# Altium PCB PCB layout.PcbDoc
Units mil, origin at the board's own origin, x right, y up, seen from the top; angles counter-clockwise.
Board outline 1820 x 1890 mil, 2 copper layers (Top Layer, Bottom Layer); 22 components, 21 nets, 82 pads, 2 vias.
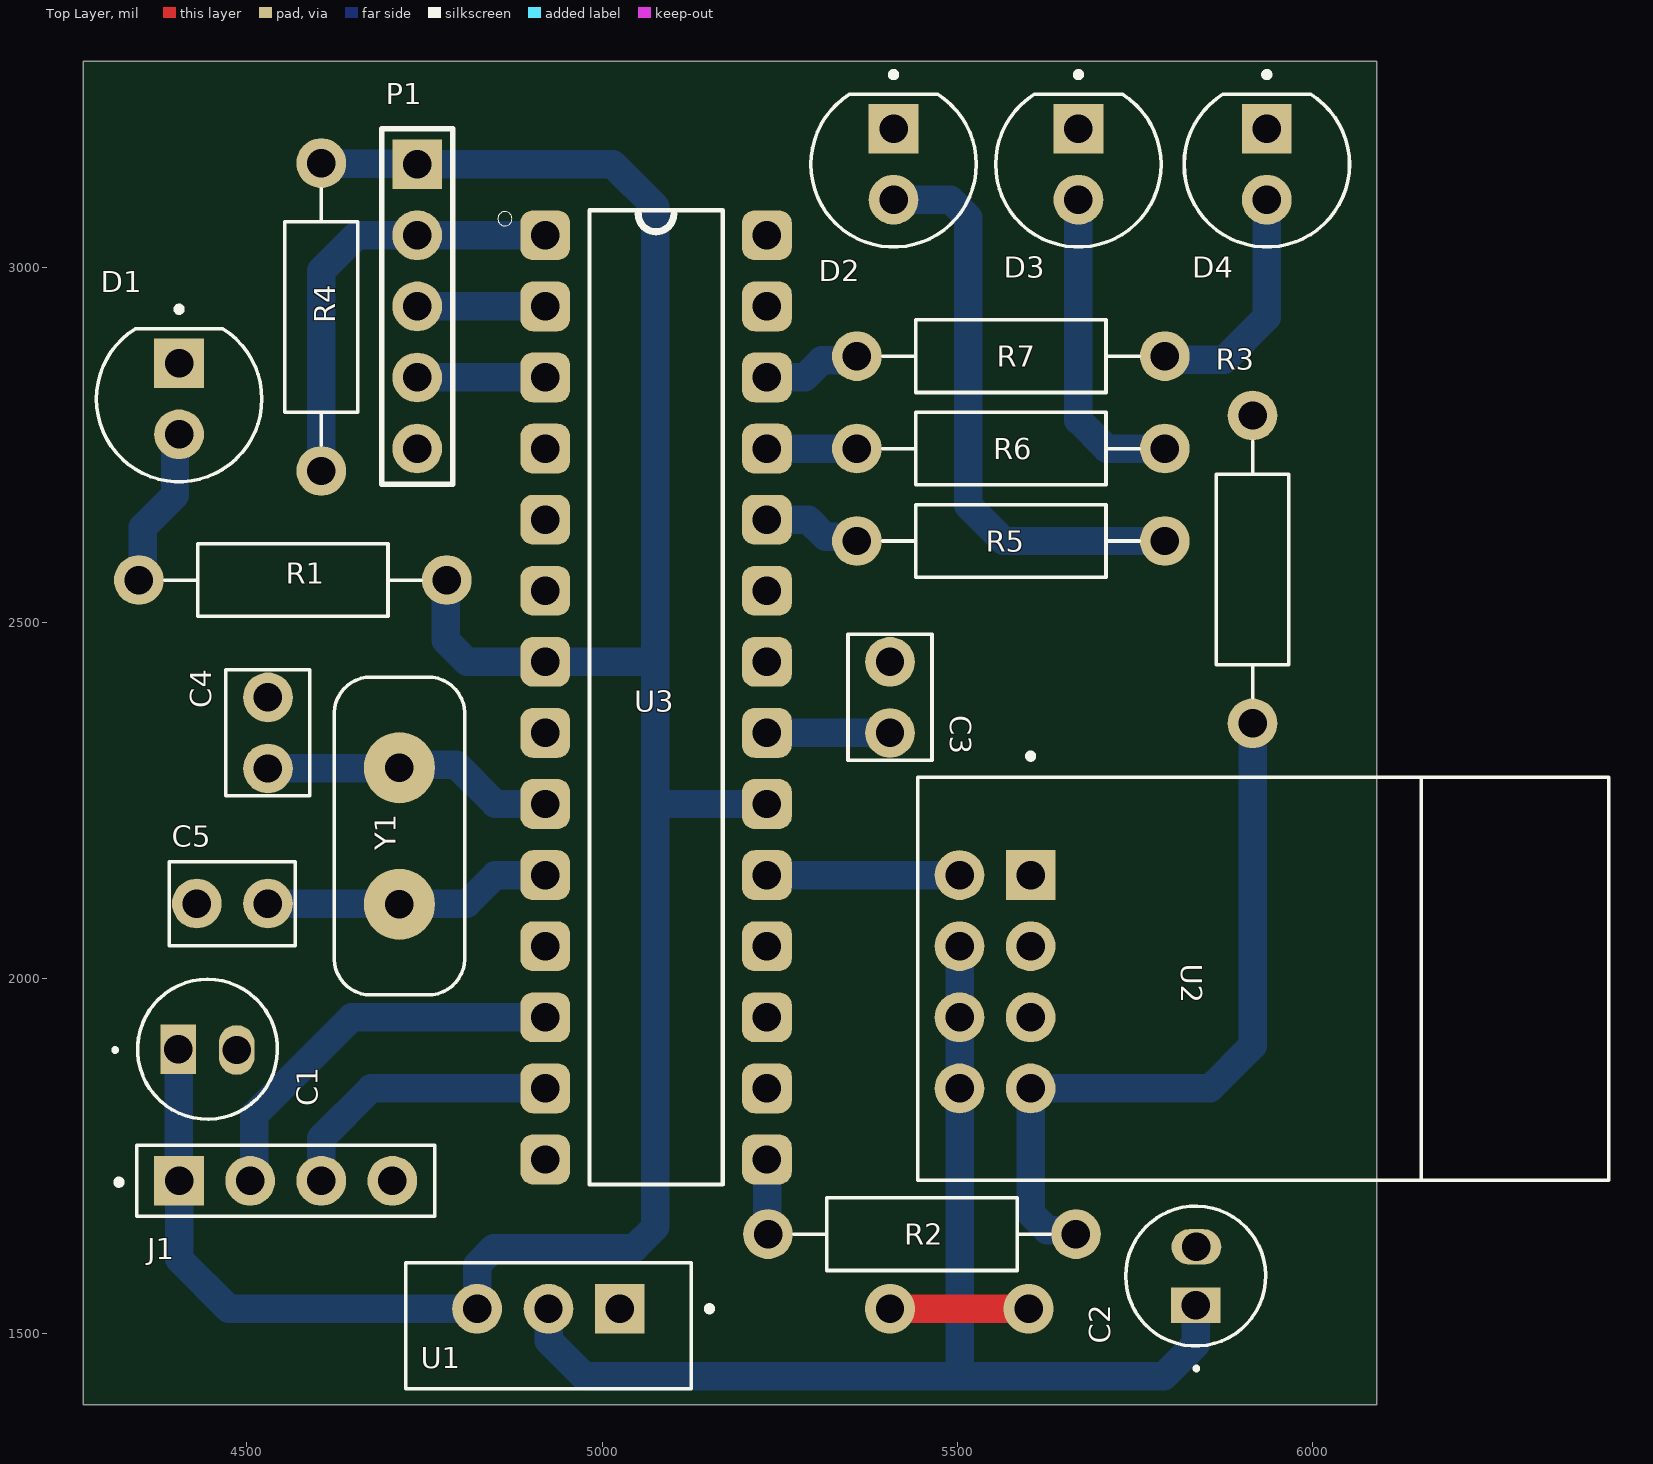
[diagram p0: Top Layer view]
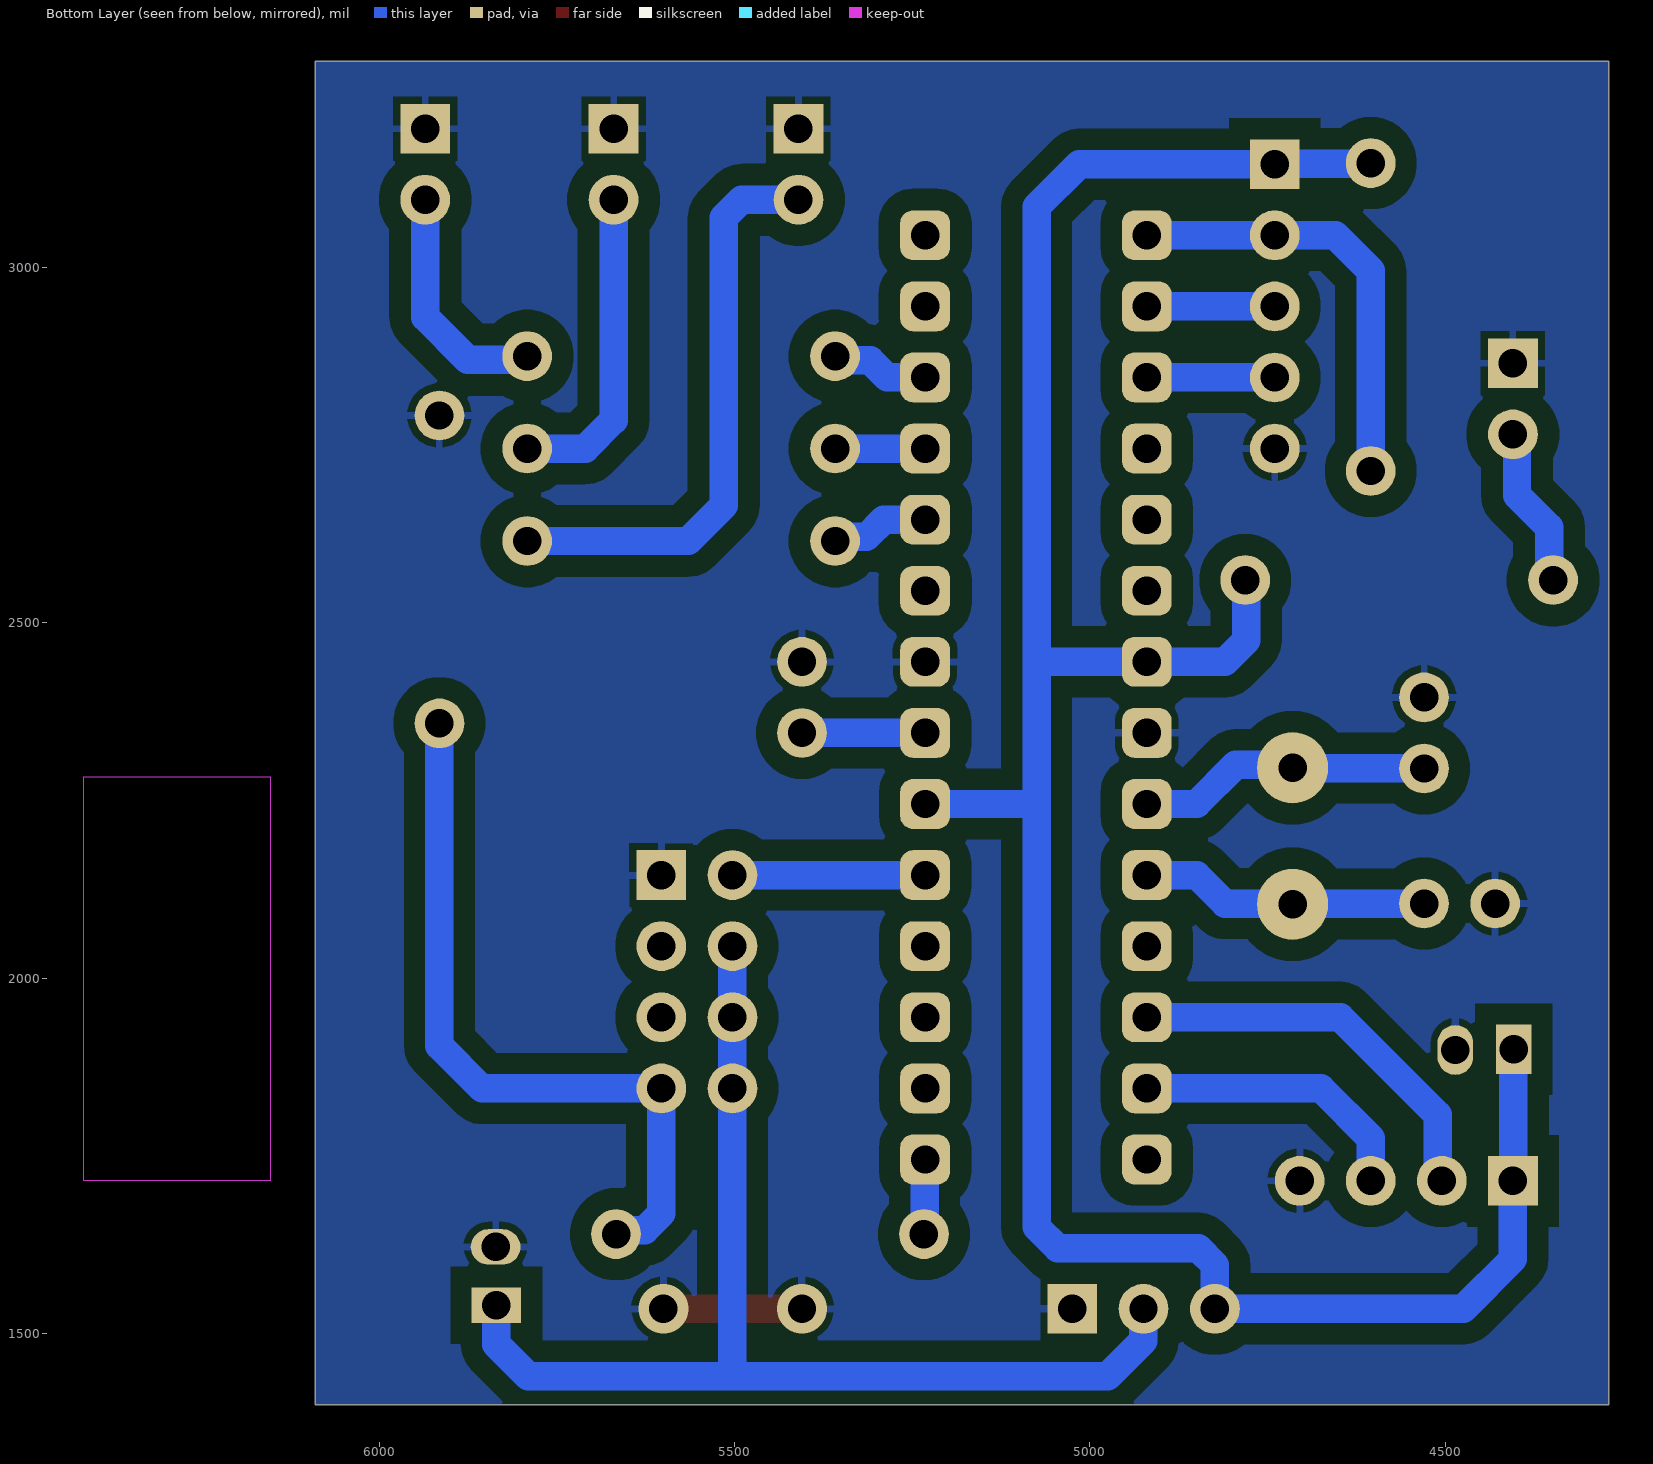
[diagram p1: Bottom Layer view, seen from below]
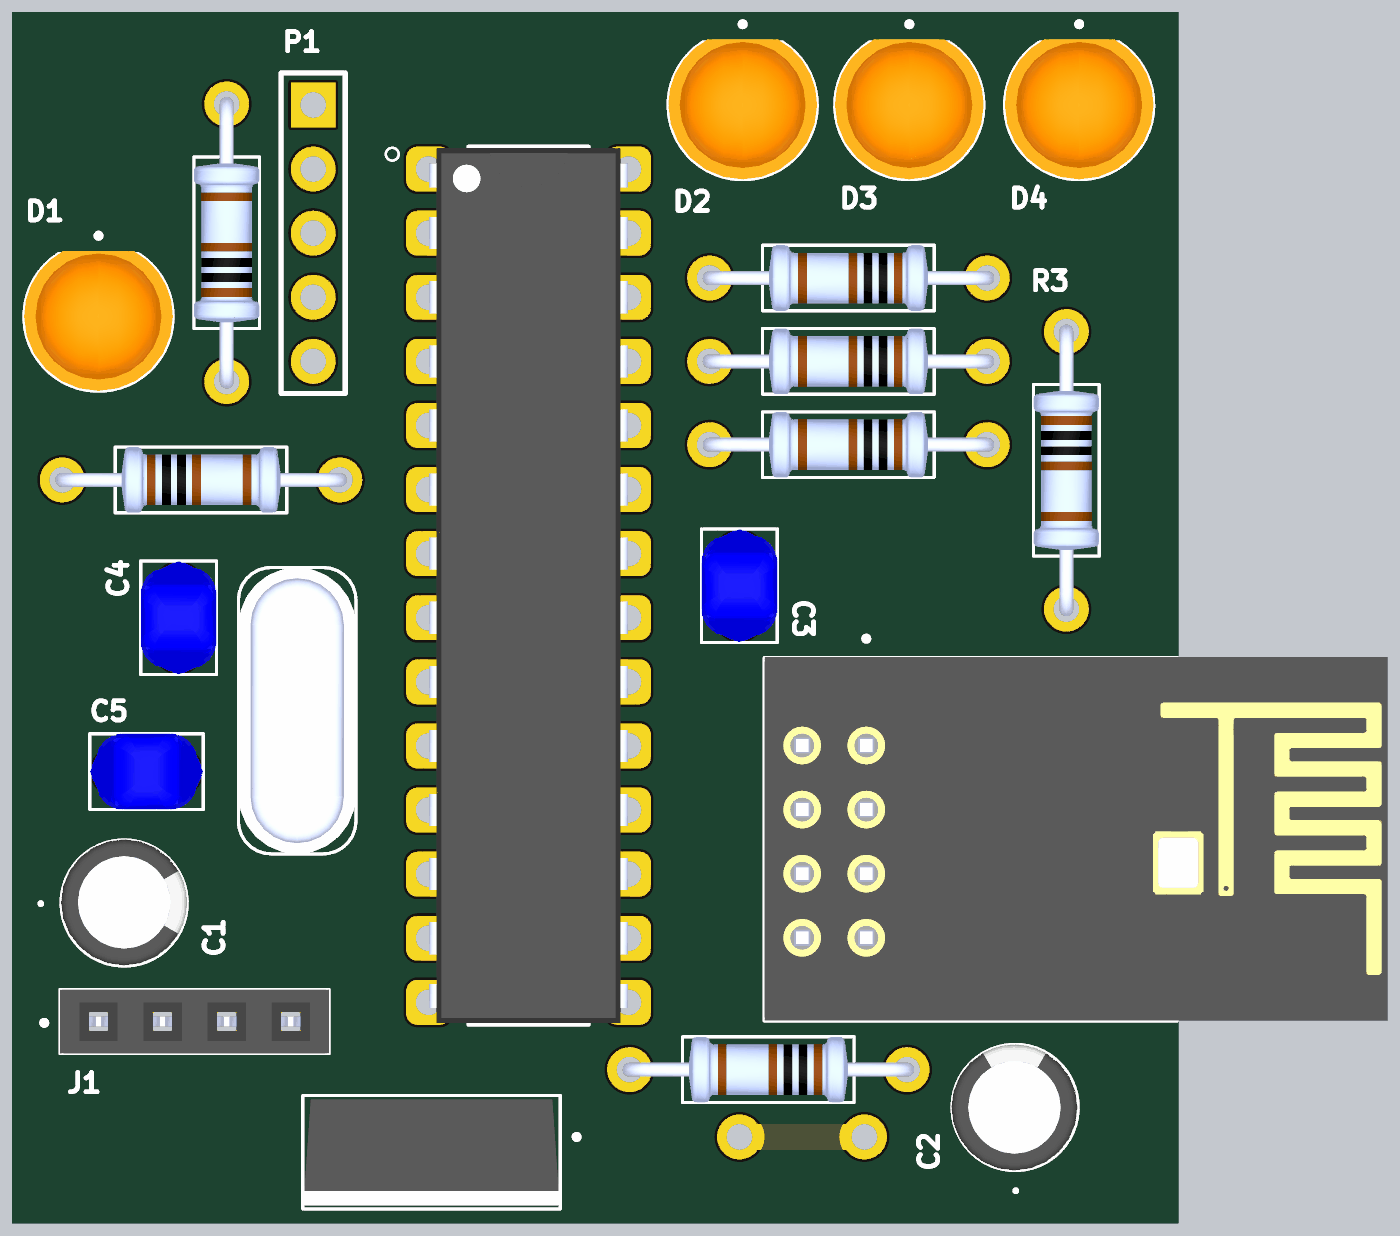
[diagram p2: 3D render of the assembled board from above, using the file's embedded part models]

## Layer stack, top to bottom
Top Solder: solder mask 0.4, Solder Resist, Dk 3.5
Top Layer: signal copper 1.4
Dielectric 1: dielectric 12.6, FR-4, Dk 4.8
Bottom Layer: signal copper 1.4
Bottom Solder: solder mask 0.4, Solder Resist, Dk 3.5

## Board outline
4270,1400 6090,1400 6090,3290 4270,3290

## Design rules (kind name [scope] priority, off if disabled: settings)
Clearance [All] p1: gap=30 ignorepadtopadclearanceinfootprint=FALSE
PolygonConnect [All] p1: connectstyle=Relief reliefconductorwidth=10 reliefentries=4 polygonreliefangle="90 Angle" airgapwidth=10
RoutingVias [All] p1: holewidth=40 width=70 viastyle="Through Hole" minholewidth=40 minwidth=70 maxholewidth=40 maxwidth=70
SolderMaskExpansion [All] p1: expansion=4 istentingtop=FALSE
Width [All] p1: maxlimit=60 minlimit=40 preferedwidth=50
30 further rules are at their usual default settings.

## Components (designator, comment, footprint, x,y, rotation, side; value= is the part's Value field where it differs from the comment)
C1 "100uF" CAPPRD500W50D500H1100 4445,1900 r0 top
C2 "100uF" CAPPRD500W50D500H1100 5835,1581 r90 top
C3 "100nF" CAPRB500W50L450T300H550 5405,2345 r90 top
C4 "22pF" CAPRB500W50L450T300H550 4530,2295 r90 top
C5 "22pF" CAPRB500W50L450T300H550 4530,2105 r180 top
D1 "L08R5000Q1" LEDRD254W57D500H1070 4405,2815 r270 top
D2 "L08R5000Q1" LEDRD254W57D500H1070 5410,3145 r270 top
D3 "L08R5000Q1" LEDRD254W57D500H1070 5670,3145 r270 top
D4 "L08R5000Q1" LEDRD254W57D500H1070 5935,3145 r270 top
J1 "PPTC041LFBN-RC" SULLINS_PPTC041LFBN-RC 4555,1715 r0 top
P1 "Header 5" HDR1X5 4740,3145 r270 top
R1 "1k" RESAD1100W55L680D260 4565,2560 r180 top
R2 "1k1" RESAD1100W55L680D260 5450,1640 r0 top
R3 "2k2" RESAD1100W55L680D260 5915,2575 r90 top
R4 "10k" RESAD1100W55L680D260 4605,2930 r270 top
R5 "220" RESAD1100W55L680D260 5575,2615 r0 top
R6 "220" RESAD1100W55L680D260 5575,2745 r0 top
R7 "220" RESAD1100W55L680D260 5575,2875 r0 top
U1 "LD1117V33" TO255P1020X450X1968-3 4924.61,1511.18 r180 top
U2 "ESP8266-01/ESP-01" XCVR_ESP8266-01/ESP-01 5930,1995 r270 top
U3 "ATMEGA328P-PU" DIP794W46P254L2967H457Q28B 5075.91,2395 r0 top
Y1 "16MHz" XTAL_ECS-160-20-4X 4715,2200 r270 top

## Footprints (in the part's own frame and the unit in brackets; to place one, negate y for a bottom-side part, rotate by r counter-clockwise, add the part's x,y. Pads: shape width x height; smd on the part's side, far side on the other; paste and mask are expansions set on the pad)
CAPPRD500W50D500H1100 [mil]
  oval 50x70 hole 40: N(41,-1)
  rect 50x70 hole 40: P(-41,0)
  silkscreen extent -131,-98 98,98, body extent -108,-97 108,99, height 434
CAPRB500W50L450T300H550 [mil]
  round 70 hole 40: 1(0,0) 2(100,0)
  silkscreen extent -39,-59 139,59, body extent -38,-59 138,59, height 210
DIP794W46P254L2967H457Q28B [mil]
  rrect50% 70x70 hole 40: 1(-155.91,650) 2(-155.91,550) 3(-155.91,450) 4(-155.91,350) 5(-155.91,250) 6(-155.91,150) 7(-155.91,50) 8(-155.91,-50) 9(-155.91,-150) 10(-155.91,-250) 11(-155.91,-350) 12(-155.91,-450) 13(-155.91,-550) 14(-155.91,-650) 15(155.91,-650) 16(155.91,-550) 17(155.91,-450) 18(155.91,-350) 19(155.91,-250) 20(155.91,-150) 21(155.91,-50) 22(155.91,50) 23(155.91,150) 24(155.91,250) 25(155.91,350) 26(155.91,450) 27(155.91,550) 28(155.91,650)
  silkscreen extent -223,-685 94,685, body extent -156,-682 156,683, height 180
HDR1X5 [mil] "Connector; Header; 5 Position"
  rect 70x70 hole 40: 1(0,0)
  round 70 hole 40: 2(100,0) 3(200,0) 4(300,0) 5(400,0)
  silkscreen extent -50,-50 450,50
LEDRD254W57D500H1070 [mil]
  round 70 hole 40: A(50,0)
  rect 70x70 hole 40: C(-50,0)
  silkscreen extent -130,-116 116,116, body extent -102,-116 116,116, height 358
RESAD1100W55L680D260 [mil]
  round 70 hole 40: 1(-216.54,0) 2(216.54,0)
  silkscreen extent -180,-51 180,51, body extent -227,-51 227,51, height 101
SULLINS_PPTC041LFBN-RC [mil]
  rect 70x70 hole 40: 1(-150,0)
  round 70 hole 40: 2(-50,0) 3(50,0) 4(150,0)
  silkscreen extent -239,-50 210,50, body extent -210,-50 210,50, height 335
TO255P1020X450X1968-3 [mil]
  rect 70x70 hole 40: 1(-100.39,-23.82)
  round 70 hole 40: 2(0,-23.82) 3(100.39,-23.82)
  silkscreen extent -230,-89 201,89, body extent -200,-82 200,83, height 901
XCVR_ESP8266-01/ESP-01 [mil]
  rect 70x70 hole 40: 1(-150,-327.17)
  round 70 hole 40: 2(-50,-327.17) 3(50,-327.17) 4(150,-327.17) 5(-150,-427.17) 6(-50,-427.17) 7(50,-427.17) 8(150,-427.17)
  Keep-Out Layer region: 279.13,222.44 -287.8,222.44 -287.8,486.22 279.13,486.22
  silkscreen extent -321,-486 279,486, body extent -288,-486 278,486, height 256
XTAL_ECS-160-20-4X [mil]
  round 100 hole 40: 1(-96.06,0) 2(96.06,0)
  silkscreen extent -223,-92 223,92, body extent -223,-92 223,92, height 138

## Part data
C1 C2: library part "Electrolytic capacitor", "FS-A", Package=None, Availability=Unavailable, MF="{'manufacturer': u'Panasonic'}", MP=EEUFS0J221B, Price=None
C3 C4 C5: library part "Ceramic capacitor", "2200 pF Â±10% 250V Ceramic Capacitor X7R Radial", Package="Radial TDK", Check_prices=https://www.snapeda.com/parts/FG24X7R2E222KNT06/TDK/view-part/?ref=eda, Digi-Key_Part_Number=445-173386-1-ND, MF=TDK, MP=FG24X7R2E222KNT06, Purchase-URL=https://pricing.snapeda.com/search/part/FG24X7R2E222KNT06/?ref=eda, SnapEDA_Link=https://www.snapeda.com/parts/FG24X7R2E222KNT06/TDK/view-part/?ref=snap
D1 D2 D3 D4: library part LED, "LED, Orange, Through Hole, T-1 3/4 (5mm), 30 mA, 2.1 V, 635 nm", Package=None, Availability=Unavailable, MF="{'manufacturer': u'LED Technology'}", MP=L08R5000Q1, Price=None
J1: library part "Female header - 4Pins", "4 Position Header Connector Through Hole", Package=None, Availability=Warning, Check_prices=https://www.snapeda.com/parts/PPTC041LFBN-RC/Sullins%20Connector%20Solutions/view-part/285917/?ref=eda, MF="Sullins Connector", MP=PPTC041LFBN-RC, Price=None, Purchase-URL=https://pricing.snapeda.com/search/part/PPTC041LFBN-RC/?ref=eda, SnapEDA_Link=https://www.snapeda.com/parts/PPTC041LFBN-RC/Sullins%20Connector%20Solutions/view-part/285917/?ref=snap
P1: "Header, 5-Pin", LatestRevisionDate=17-Jul-2002, LatestRevisionNote="Re-released for DXP Platform.", Publisher="Altium Limited"
R1 R2 R3 R4 R5 R6 R7: library part "Resistor (0.25W)", "(MFR-25FBF52-10K) 10,2 kOhm bei 1% 0,25W, 1/4W Durchbohrlochwiderstand Axial Metal Film", Package="Axial Yageo", Digi-Key_Part_Number=10.2KXBK-ND, MF=Yageo, MP=MFR-25FBF52-10K, Purchase-URL=https://pricing.snapeda.com/search/part/MFR-25FBF52-10K/?ref=eda, SnapEDA_Link=https://www.snapeda.com/parts/MFR-25FBF52-10K/Yageo/view-part/424333/?ref=snap
U1: Package=None, Availability=Unavailable, MP=LD1117V33, Price=None
U2: library part "ESP8266-01 Module", "MakerFocus 4pcs ESP8266 ESP-01 Serial Wireless WiFi Transceiver Receiver Module 1MB SPI Flash DC3.0-3.6V Internet of Things WiFi Module Board Compatible with Ar duino", Package=None, Availability=Unavailable, MP=ESP8266-01/ESP-01, Price=None
U3: "ATmega Series 20 MHz 32 KB Flash 2 KB SRAM 8-Bit Microcontroller - DIP-28", Package=None, Availability=Unavailable, MP=ATMEGA328P-PU, Price=None
Y1: library part "Crystal oscilator", "CRYSTAL T/H", Package=None, Availability=Unavailable, MF="{'manufacturer': u'ECS Inc.'}", MP=ECS-160-S-4, Price=None

## Via types
v1: diameter 70, hole 40, Top Layer to Bottom Layer, 2 vias

## Nets (pads, with @x,y where several pads share a name; then routed paths per layer and width w, separated by ;. In a path a pad name is that pad's centre, name@x,y a point inside that pad or via, vN(x,y) a via of type N, cw(c..) or ccw(c..) an arc to the next point about the centre after c; other vN are vias at no path point)
+3V3: C2.P U1.2 U2.6 U2.7 U2.8 | length 1654.4
  Bottom Layer w40: U1.2@4925,1535 4925,1490 4975,1440 5502.83,1440 ; U2.6 U2.7 U2.8 5502.83,1440 ; C2.P 5835,1485 5790,1440 5502.83,1440
echo: J1.3 U3.13 | length 404
  Bottom Layer w40: J1.3 4605,1775 4675,1845 U3.13
esp_rx: R2.1 U3.15 | length 105.7
  Bottom Layer w40: U3.15 5232.64,1744.17 5232.64,1640.83 R2.1
esp_tx: U2.5 U3.19 | length 271
  Bottom Layer w40: U3.19 U2.5
GND: C1.N C2.N C3.2 C4.2 C5.2 D1.C D2.C D3.C D4.C J1.4 P1.5 R3.2 U1.1 U2.1 U3.8 U3.22 | length 195
  Top Layer w40: v1(5405,1535) v1(5600,1535)
green: R7.1 U3.26 | length 139.1
  Bottom Layer w40: U3.26 5285,2845 5309.26,2869.26 5352.72,2869.26 R7.1
NetC3_1: C3.1 U3.21 | length 173.2
  Bottom Layer w40: U3.21 C3.1
NetD1_A: D1.A R1.2 | length 228.4
  Bottom Layer w40: R1.2 4354.2,2565.74 4354.2,2634.2 4399.26,2679.26 4399.26,2759.26 D1.A
NetD2_A: D2.A R5.2 | length 817.6
  Bottom Layer w40: D2.A 5490,3095 5515,3070 5515,2665 5565,2615 R5.2
NetD3_A: D3.A R6.2 | length 448.1
  Bottom Layer w40: D3.A 5670,2785 5710,2745 R6.2
NetD4_A: D4.A R7.2 | length 335.4
  Bottom Layer w40: R7.2 5796.54,2870 5875,2870 5935,2930 D4.A
NetR2_2: R2.2 R3.1 U2.4 | length 1042.1
  Bottom Layer w40: R2.2 5660.8,1645.74 5626.27,1645.74 5602.83,1669.17 U2.4 5855,1845 5915,1905 R3.1
red: R5.1 U3.24 | length 139.1
  Bottom Layer w40: U3.24 5290,2645 5314.26,2620.74 5352.72,2620.74 R5.1
reset: P1.2 R4.2 U3.1 | length 617.2
  Bottom Layer w40: R4.2 4605,2995 4655,3045 P1.2 U3.1
rx: P1.4 U3.3 | length 180
  Bottom Layer w40: P1.4 U3.3
trig: J1.2 U3.12 | length 561.2
  Bottom Layer w40: J1.2 4510.74,1720.74 4510.74,1807.67 4648.07,1945 U3.12
tx: P1.3 U3.2 | length 180
  Bottom Layer w40: P1.3 U3.2
VCC: C1.P J1.1 P1.1 R1.1 R4.1 U1.3 U3.7 U3.20 | length 3546.7
  Bottom Layer w40: C1.P 4404.5,1899.5 4404.5,1715.5 J1.1 4405,1605 4475,1535 U1.3 ; R4.1 4605.77,3145.77 4739.23,3145.77 P1.1 5015,3145 5075,3085 5075,2445 ; R1.1 4780,2558.46 4780,2475 4810,2445 U3.7 5075,2445 ; U1.3@4824.21,1548.86 4824.21,1596.57 4847.64,1620 5045,1620 5075,1650 5075,2250 ; U3.20 5080,2245 5075,2250 ; 5075,2250 5075,2445
xtal1: C4.1 U3.9 Y1.1 | length 415.1
  Bottom Layer w40: C4.1 4530.53,2295.53 4714.47,2295.53 Y1.1 4719.19,2300.25 4794.75,2300.25 4850,2245 U3.9
xtal2: C5.1 U3.10 Y1.2 | length 407.4
  Bottom Layer w40: C5.1 4530.53,2104.47 4714.47,2104.47 Y1.2 4716.06,2105 4810,2105 4850,2145 U3.10
yellow: R6.1 U3.25 | length 126.7
  Bottom Layer w40: U3.25 R6.1
pads on no net: U2.2 U2.3 U3.4 U3.5 U3.6 U3.11 U3.14 U3.16 U3.17 U3.18 U3.23 U3.27 U3.28

## Polygon pours and split planes (outlines as drawn)
GND on Bottom Layer "GND_L02_P000" (solid, pour order 0): 4270,3290 4270,1400 6090,1400 6090,3290